# EAGLE board table_light_shield (EAGLE 6.6.0)
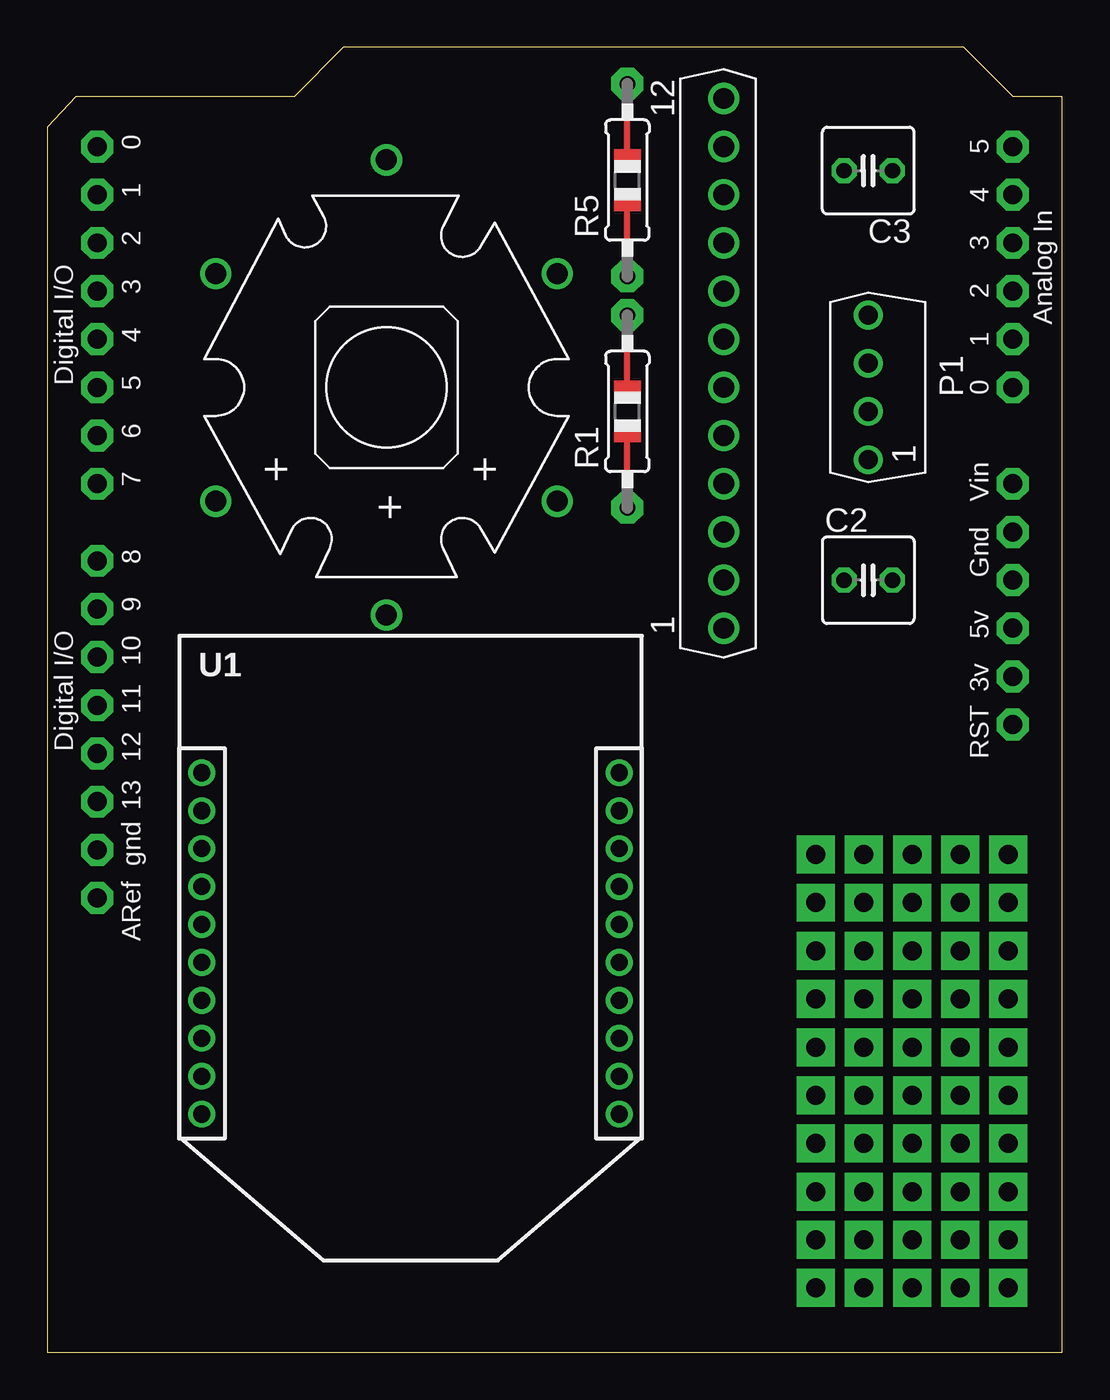
[diagram p0: board, top side]
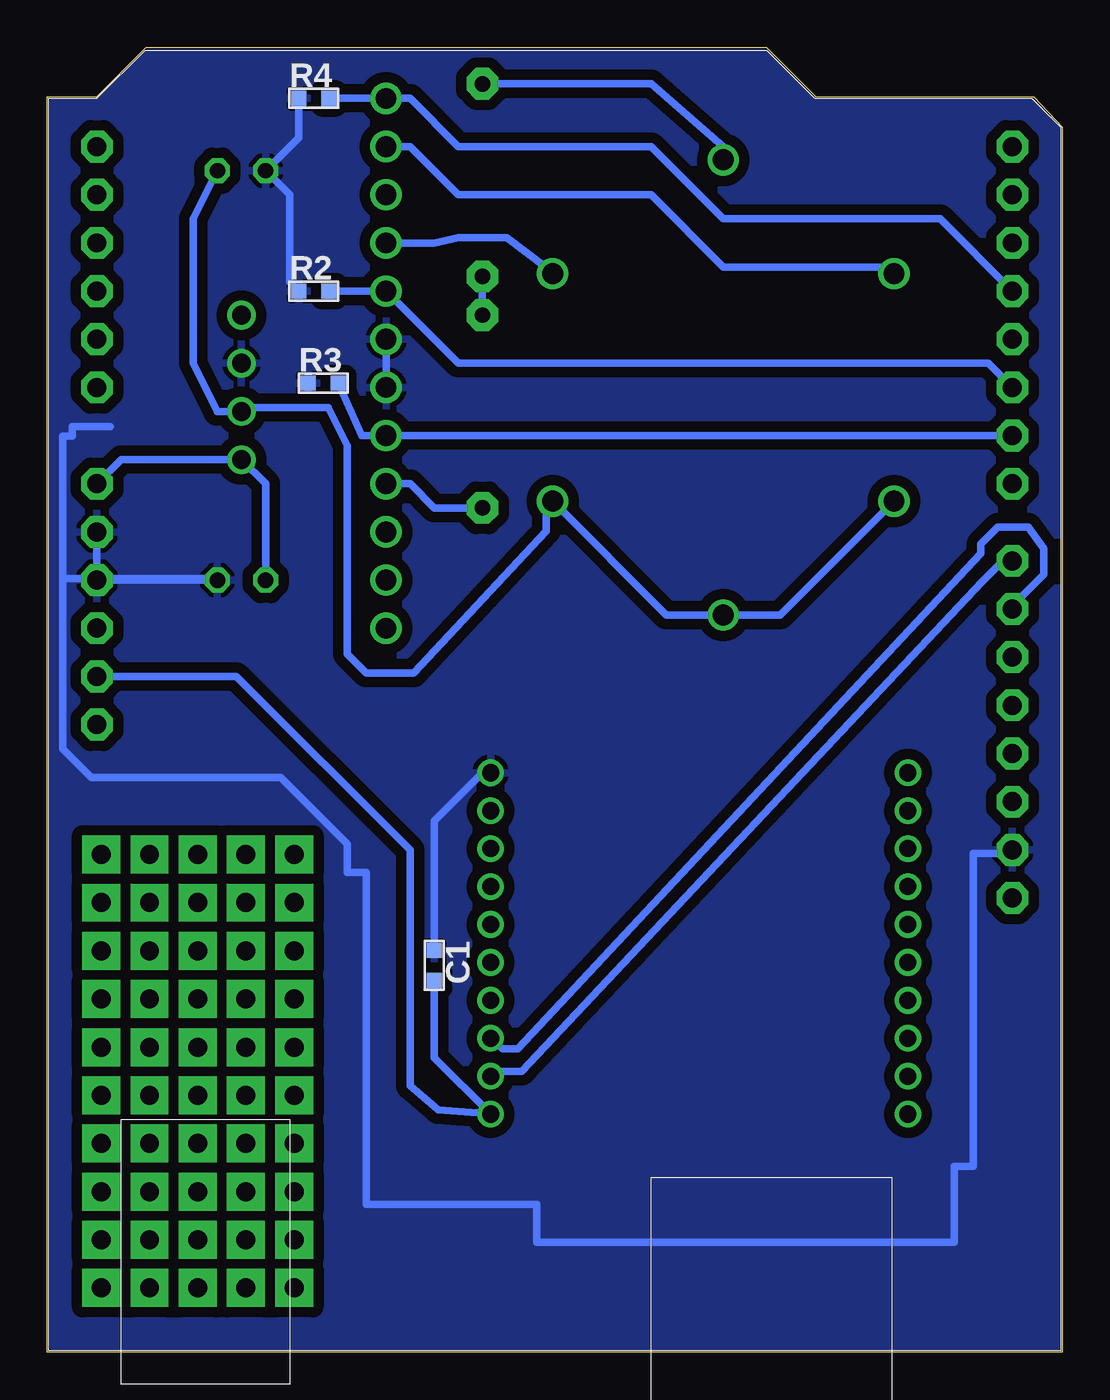
[diagram p1: board, bottom side, seen from below]

Size 53.5 x 68.8 mm. Coordinates in mm from the lower left corner, seen from the top.
Outline: 53.5,0 53.5,66.2 50.9,66.2 48.3,68.8 15.6,68.8 13,66.2 1.5,66.2 0,64.6 0,0 53.5,0
Copper layers (1*16): Top 0.035mm / dielectric 1.5mm / Bottom 0.035mm
Design rules "default *": minimum track width 10mil, minimum drill 24mil, track to track 8mil, track to pad 8mil, pad to pad 8mil, via to via 8mil, smd to smd 8mil, copper to edge 0mil, drill to drill 8mil, minimum pad ring 10mil, minimum via ring 8mil, stop-mask expansion 4mil, vias tented up to drill 0mil, thermal gap 10mil

## Footprints (pad centres in the part's own frame; a part is rotated, then mirrored left to right if it is on the bottom)
1608(1.6*0.8MM) = smd 0.8 x 0.8: P$1 0.8,0; P$2 -0.8,0
C025-050X050 = drill 0.813 octagon: 1 -1.27,0; 2 1.27,0
OSTCXBC1C1S_WITH_HEATSINK = drill 1.1: B+ -6,9; B- 6,9; G+ -6,-9; G- 6,-9; R+ -12,0; R- 12,0
PQ3RD23 = drill 1: 1 -3.81,0; 2 -1.27,0; 3 1.27,0; 4 3.81,0
MP4401 = drill 1.1: 1 -13.97,0; 2 -11.43,0; 3 -8.89,0; 4 -6.35,0; 5 -3.81,0; 6 -1.27,0; 7 1.27,0; 8 3.81,0; 9 6.35,0; 10 8.89,0; 11 11.43,0; 12 13.97,0
0805-THM = drill 0.813 pad 1.676 octagon: 1 -5.08,0; 2 5.08,0
1608(1.6*0.8MM)' = smd 0.8 x 0.8: P$3 -0.8,0; P$4 0.8,0
XBEE_ON_XPPN101BFCN-RC = drill 0.9: 1 -11,18; 2 -11,16; 3 -11,14; 4 -11,12; 5 -11,10; 6 -11,8; 7 -11,6; 8 -11,4; 9 -11,2; 10 -11,0; 11 11,0; 12 11,2; 13 11,4; 14 11,6; 15 11,8; 16 11,10; 17 11,12; 18 11,14; 19 11,16; 20 11,18
ARDUINO-NOHOLE = drill 1 pad 1.676 octagon: 3V 35.56,2.54; 5V 38.1,2.54; A0 50.8,2.54; A1 53.34,2.54; A2 55.88,2.54; A3 58.42,2.54; A4 60.96,2.54; A5 63.5,2.54; AREF 23.876,50.8; D0 63.5,50.8; D1 60.96,50.8; D2 58.42,50.8; D3 55.88,50.8; D4 53.34,50.8; D5 50.8,50.8; D6 48.26,50.8; D7 45.72,50.8; D8 41.656,50.8; D9 39.116,50.8; D10 36.576,50.8; D11 34.036,50.8; D12 31.496,50.8; D13 28.956,50.8; GND 26.416,50.8; GND1 43.18,2.54; GND2 40.64,2.54; RESET 33.02,2.54; VIN 45.72,2.54

## Placement (x,y rotation side)
C1  [1608(1.6*0.8MM)]  33.11,20.39 270 bottom
C2  50u  [C025-050X050]  43.27,40.71 0 top
C3  50u  [C025-050X050]  43.27,62.3 180 top
LED1  OSTCXBC1C1S  [OSTCXBC1C1S_WITH_HEATSINK]  17.87,50.87 90 top
P1  PQ3RD23  [PQ3RD23]  43.27,50.87 90 top
Q1  MP4401  [MP4401]  35.65,52.14 90 top
R1  1  [0805-THM]  30.57,49.6 90 top
R2  10k  [1608(1.6*0.8MM)']  39.46,55.95 0 bottom
R3  10k  [1608(1.6*0.8MM)']  38.96,51.1 0 bottom
R4  10k  [1608(1.6*0.8MM)']  39.46,66.11 0 bottom
R5  1  [0805-THM]  30.57,61.8 90 top
U1  XBEE_PROXPPN101BFCN  [XBEE_ON_XPPN101BFCN-RC]  19.14,30.55 180 top
U$1  ARDUINO-NOHOLE  [ARDUINO-NOHOLE]  53.43,0.07 90 top

## Library data of the parts
C1 = Capasitor
C2 C3 = rcl
LED1 = LED
P1 = Voltage Regulator
Q1 = FET n-ch
R1 R5 U$1 = adafruit
R2-R4 = Resistor
U1 = ZigBee Modules

## Nets
5V: U$1.5V
GND: C1.P$2 C2.2 C3.2 P1.3 Q1.6 Q1.7 R2.P$3 R3.P$3 R4.P$3 U1.10 U$1.GND U$1.GND1 U$1.GND2
N$1: C2.1 P1.1 U$1.VIN
N$2: Q1.4 R1.1
N$3: Q1.5 R3.P$4 U$1.D6
N$4: Q1.8 R2.P$4 U$1.D5
N$5: Q1.12 R4.P$4 U$1.D3
N$6: C1.P$1 U1.1 U$1.3V
N$7: U1.2 U$1.D8
N$8: U1.3 U$1.D9
N$9: LED1.B- Q1.11
N$10: LED1.R- R5.2
N$11: R1.2 R5.1
N$13: C3.1 LED1.B+ LED1.G+ LED1.R+ P1.2
N$14: LED1.G- Q1.9

## Tracks (layer width: path | path; a pad name or v marks a point on that pad's centre or on a via)
GND
  Bottom 0.406: U$1.GND1 U$1.GND2 C2.2 44.54,40.8 52.7,40.8 | R2.P$3 40.73,56.42 40.73,61.03 C3.2 40.26,64.04 R4.P$3 | Q1.6 Q1.7 | U1.10 30.57,30.55 33.11,28.01 C1.P$2 | 52.7,40.8 52.7,48.3 52.2,48.3 52.2,48.8 50.2,48.8 | U$1.GND 2.63,26.3 4.7,26.3 4.7,9.8 5.7,9.8 5.7,5.8 27.7,5.8 27.7,7.8 36.7,7.8 36.7,25.3 37.7,25.3 37.7,26.8 41.2,30.3 51.2,30.3 52.7,31.8 52.7,40.8
  pour Bottom (isolate 0.55): 53.2,0.3 0.3,0.3 0.3,64.5 1.7,65.9 13.1,65.9 15.7,68.5 48.2,68.5 50.8,65.9 53.2,65.9
N$1
  Bottom 0.406: C2.1 42,45.79 P1.1 49.62,47.06 U$1.VIN
N$2
  Bottom 0.406: Q1.4 34.38,45.79 33.11,44.52 R1.1
N$3
  Bottom 0.406: R3.P$4 36.92,48.33 Q1.5 U$1.D6
N$4
  Bottom 0.406: R2.P$4 Q1.8 31.84,52.14 3.9,52.14 U$1.D5
N$5
  Bottom 0.406: R4.P$4 Q1.12 34.38,66.11 31.84,63.57 21.68,63.57 17.87,59.76 6.44,59.76 U$1.D3
N$6
  Bottom 0.406: U$1.3V 43.54,35.63 34.38,26.47 34.38,14.04 32.9,12.77 U1.1 33.11,15.52 C1.P$1
N$7
  Bottom 0.406: U1.2 29.7,14.8 28.5,14.8 4.21,40.63 3.19,41.67 U$1.D8
N$8
  Bottom 0.406: U1.3 29.5,16 28.7,16 4.3,42.1 4.3,42.6 3.4,43.5 1.8,43.5 0.99,42.38 0.99,41.01 2.36,39.64 2.38,39.64 U$1.D9
N$9
  Bottom 0.406: Q1.11 34.38,63.57 31.84,61.03 21.68,61.03 17.87,57.22 9.22,57.22 LED1.B-
N$10
  Bottom 0.406: R5.2 21.68,66.88 17.87,63.57 LED1.R-
N$11
  Bottom 0.406: R5.1 R1.2
N$12  (via drill 1 pad 2)
  other vias: 40.5,16.08
N$13
  Bottom 0.406: C3.1 45.81,59.76 45.81,52.14 44.54,49.6 P1.2 42.7,49.8 38.7,49.8 37.7,47.8 37.7,36.8 36.7,35.8 34.2,35.8 27.2,43.3 27.2,44.8 LED1.G+ 20.87,38.87 LED1.R+ 14.87,38.87 LED1.B+
N$14
  Bottom 0.406: Q1.9 33.11,58.49 31.84,58.76 29.3,58.76 27.22,57.22 LED1.G-
N$15  (via drill 1 pad 2)
  other vias: 40.5,18.62
N$16  (via drill 1 pad 2)
  other vias: 40.5,21.16
N$17  (via drill 1 pad 2)
  other vias: 40.5,23.7
N$18  (via drill 1 pad 2)
  other vias: 40.5,26.24
N$19  (via drill 1 pad 2)
  other vias: 43.04,16.08
N$20  (via drill 1 pad 2)
  other vias: 43.04,18.62
N$21  (via drill 1 pad 2)
  other vias: 43.04,21.16
N$22  (via drill 1 pad 2)
  other vias: 43.04,23.7
N$23  (via drill 1 pad 2)
  other vias: 43.04,26.24
N$24  (via drill 1 pad 2)
  other vias: 45.58,26.24
N$25  (via drill 1 pad 2)
  other vias: 45.58,23.7
N$26  (via drill 1 pad 2)
  other vias: 45.58,21.16
N$27  (via drill 1 pad 2)
  other vias: 45.58,18.62
N$28  (via drill 1 pad 2)
  other vias: 45.58,16.08
N$29  (via drill 1 pad 2)
  other vias: 48.12,16.08
N$30  (via drill 1 pad 2)
  other vias: 48.12,18.62
N$31  (via drill 1 pad 2)
  other vias: 48.12,21.16
N$32  (via drill 1 pad 2)
  other vias: 48.12,23.7
N$33  (via drill 1 pad 2)
  other vias: 48.12,26.24
N$34  (via drill 1 pad 2)
  other vias: 50.66,26.24
N$35  (via drill 1 pad 2)
  other vias: 50.66,23.7
N$36  (via drill 1 pad 2)
  other vias: 50.66,21.16
N$37  (via drill 1 pad 2)
  other vias: 50.66,18.62
N$38  (via drill 1 pad 2)
  other vias: 50.66,16.08
N$39  (via drill 1 pad 2)
  other vias: 50.66,13.54
N$40  (via drill 1 pad 2)
  other vias: 48.12,13.54
N$41  (via drill 1 pad 2)
  other vias: 45.58,13.54
N$42  (via drill 1 pad 2)
  other vias: 43.04,13.54
N$43  (via drill 1 pad 2)
  other vias: 40.5,13.54
N$44  (via drill 1 pad 2)
  other vias: 40.5,3.38
N$45  (via drill 1 pad 2)
  other vias: 43.04,11
N$46  (via drill 1 pad 2)
  other vias: 45.58,11
N$47  (via drill 1 pad 2)
  other vias: 48.12,11
N$48  (via drill 1 pad 2)
  other vias: 50.66,11
N$49  (via drill 1 pad 2)
  other vias: 50.66,3.38
N$50  (via drill 1 pad 2)
  other vias: 50.66,5.92
N$51  (via drill 1 pad 2)
  other vias: 50.66,8.46
N$52  (via drill 1 pad 2)
  other vias: 48.12,5.92
N$53  (via drill 1 pad 2)
  other vias: 48.12,3.38
N$54  (via drill 1 pad 2)
  other vias: 45.58,3.38
N$55  (via drill 1 pad 2)
  other vias: 45.58,5.92
N$56  (via drill 1 pad 2)
  other vias: 48.12,8.46
N$57  (via drill 1 pad 2)
  other vias: 45.58,8.46
N$58  (via drill 1 pad 2)
  other vias: 43.04,5.92
N$59  (via drill 1 pad 2)
  other vias: 43.04,8.46
N$60  (via drill 1 pad 2)
  other vias: 40.5,11
N$61  (via drill 1 pad 2)
  other vias: 40.5,8.46
N$62  (via drill 1 pad 2)
  other vias: 40.5,5.92
N$63  (via drill 1 pad 2)
  other vias: 43.04,3.38